# EAGLE board BRAT (EAGLE 7.7.0)
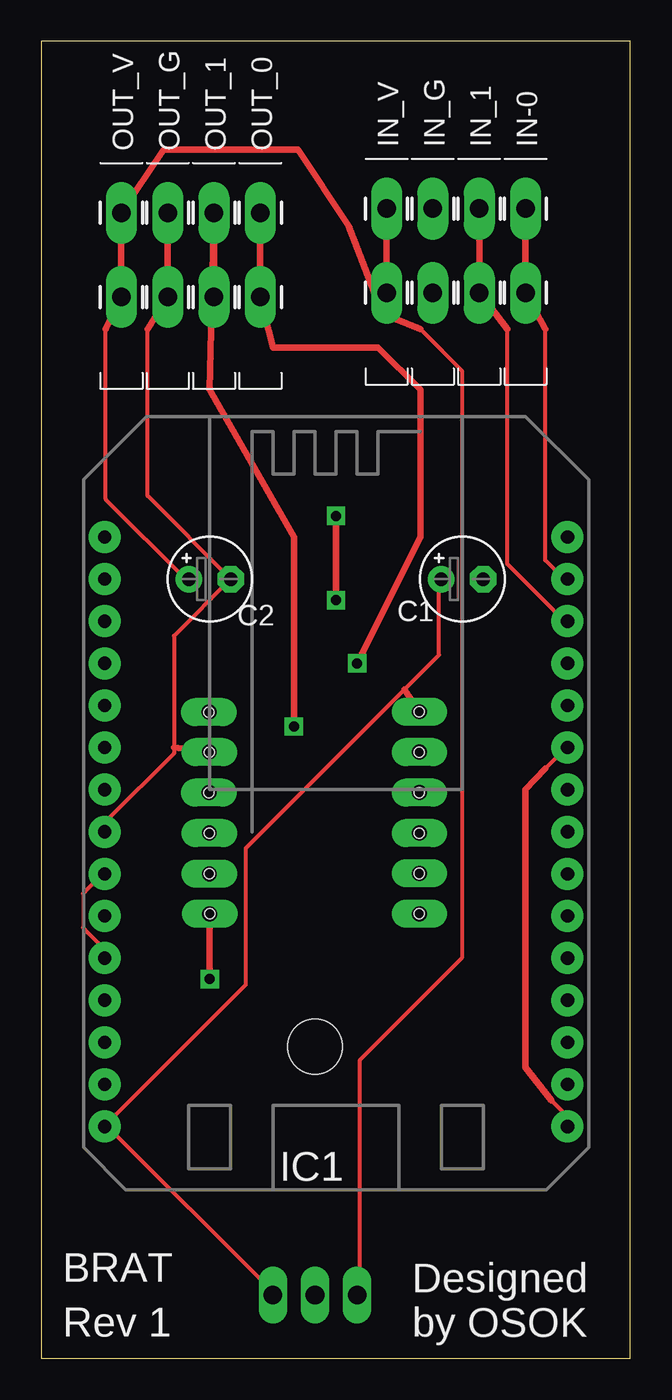
[diagram p0: board, top side]
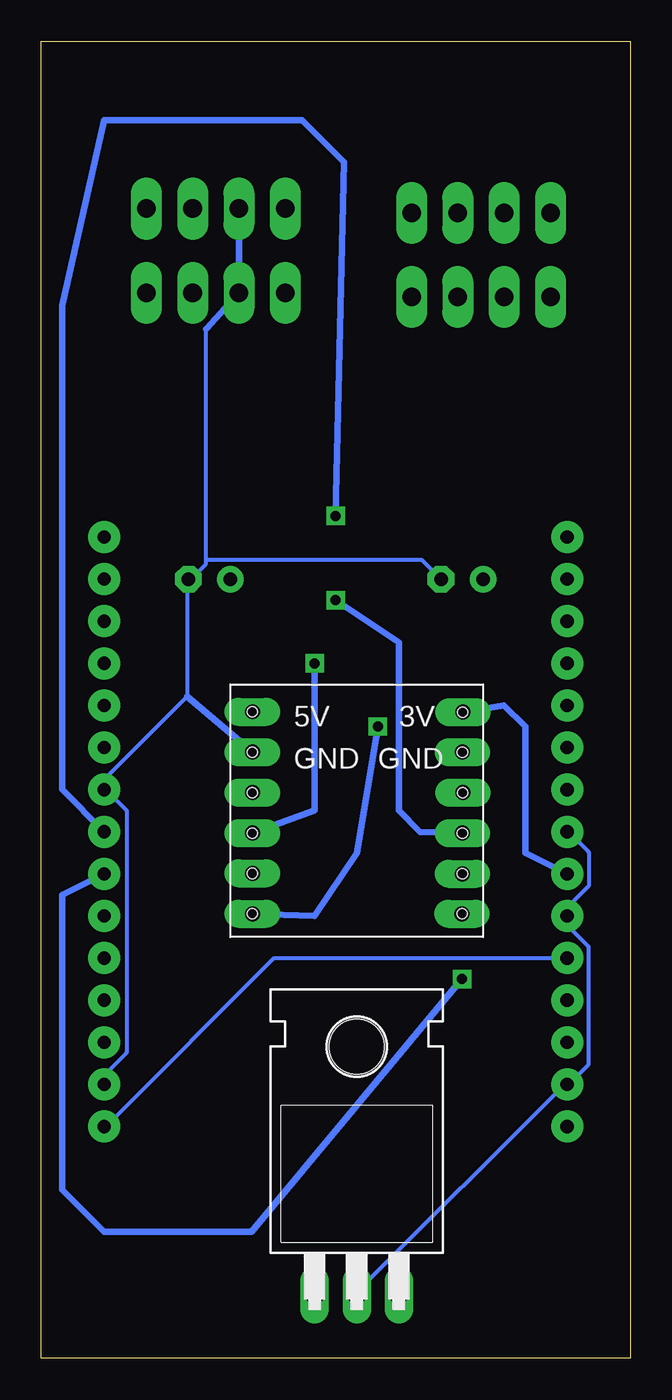
[diagram p1: board, bottom side, seen from below]

Size 35.54 x 79.43 mm. Coordinates in mm from the lower left corner, seen from the top.
Outline: 0,0 35.54,0 35.54,79.43 0,79.43 0,0
Copper layers (1*16): Top 0.035mm / dielectric 1.5mm / Bottom 0.035mm
Design rules "SparkFun": minimum track width 8mil, minimum drill 20mil, track to track 8mil, track to pad 8mil, pad to pad 8mil, via to via 8mil, smd to smd 8mil, copper to edge 10mil, drill to drill 8mil, minimum pad ring 12mil, minimum via ring 10mil, stop-mask expansion 4mil, vias tented up to drill 25mil, thermal gap 10mil

## Footprints (pad centres in the part's own frame; a part is rotated, then mirrored left to right if it is on the bottom)
E2,5-5 = drill 0.813 pad 1.6: + -1.27,0 | drill 0.813 pad 1.6 octagon: - 1.27,0
TO220H = drill 1.118 long: 1 -2.54,-10.16; 2 0,-10.16; 3 2.54,-10.16 | hole 3.302: 0,4.826
1X01_LONGPAD = drill 1.118 pad 1.88 long: 1 -5.08,0; 2 0,0
ESP12_DEVKIT = drill 0.8 pad 1.93: 3V3@0 -13.97,-7.62; 3V3@1 13.97,5.08; 3V3@2 13.97,-17.78; 3V3@3 -13.97,-2.54; 5V -13.97,-17.78; A0 -13.97,17.78; D0 13.97,17.78; D1 13.97,15.24; D2 13.97,12.7; D3 13.97,10.16; D4 13.97,7.62; D5 13.97,0; D6 13.97,-2.54; D7 13.97,-5.08; D8 13.97,-7.62; EN -13.97,-10.16; GND@0 -13.97,-5.08; GND@1 -13.97,-15.24; GND@2 13.97,2.54; GND@3 13.97,-15.24; GND@4 -13.97,0; RST -13.97,-12.7; RSV@0 -13.97,15.24; RSV@1 -13.97,12.7; RSV@2 -13.97,10.16; RSV@3 -13.97,7.62; RSV@4 -13.97,5.08; RSV@5 -13.97,2.54; RX 13.97,-10.16; TX 13.97,-12.7
TE291-THRU-HOLE = drill 0.9 pad 1.676 long: P$1 1.321,13.589; P$2 1.321,11.151; P$3 1.321,8.712; P$4 1.321,6.274; P$5 1.321,3.835; P$6 1.321,1.397; P$7 13.97,1.397; P$8 13.995,3.81; P$9 13.995,6.274; P$10 14.021,8.712; P$11 13.995,11.151; P$12 14.021,13.564 | hole 0.6: 1.321,1.397; 1.321,3.835; 1.321,6.274; 1.321,8.712; 1.321,11.151; 1.321,13.589; 13.97,1.397; 13.995,3.81; 13.995,6.274; 14.021,8.712; 13.995,11.151; 14.021,13.564

## Placement (x,y rotation side)
C1  10uF50V  [E2,5-5]  25.4,46.99 0 top
C2  10uF50V  [E2,5-5]  10.16,46.99 0 top
IC1  7805T  [TO220H]  16.51,13.97 0 bottom
IN-0  EDGE_WIRE_TERMINAL  [1X01_LONGPAD]  29.21,69.34 90 top
IN_1  EDGE_WIRE_TERMINAL  [1X01_LONGPAD]  26.42,69.34 90 top
IN_G  EDGE_WIRE_TERMINAL  [1X01_LONGPAD]  23.62,69.34 90 top
IN_V  EDGE_WIRE_TERMINAL  [1X01_LONGPAD]  20.83,69.34 90 top
OUT_0  EDGE_WIRE_TERMINAL  [1X01_LONGPAD]  13.21,69.09 90 top
OUT_1  EDGE_WIRE_TERMINAL  [1X01_LONGPAD]  10.41,69.09 90 top
OUT_G  EDGE_WIRE_TERMINAL  [1X01_LONGPAD]  7.62,69.09 90 top
OUT_V  EDGE_WIRE_TERMINAL  [1X01_LONGPAD]  4.83,69.09 90 top
U$1  ESP12_DEVKIT  [ESP12_DEVKIT]  17.78,31.75 0 top
U$2  TE291-DEV  [TE291-THRU-HOLE]  24.13,25.4 0 bottom

## Library data of the parts
C1 C2 = rcl
IC1 = linear
IN-0 IN_1 IN_G IN_V OUT_0 OUT_1 OUT_G OUT_V = GD_Edge_Wire_Terminal
U$1 = nodemcu-v0.9
U$2 = level-converter-TE291

## Nets
3V3: U$1.3V3@0 U$1.3V3@1 U$1.3V3@2 U$1.3V3@3 U$2.P$12
5V: C1.+ IC1.3 U$1.5V U$2.P$1
18V: C2.+ IC1.1 IN_V.1 IN_V.2 OUT_V.1 OUT_V.2
DATA0_3V3_OUT: U$1.D5 U$2.P$9
DATA0_IN: IN-0.1 IN-0.2 U$1.D1
DATA0_OUT: OUT_0.1 OUT_0.2 U$2.P$4
DATA1_3V3_OUT: U$1.D6 U$2.P$7
DATA1_IN: IN_1.1 IN_1.2 U$1.D2
DATA1_OUT: OUT_1.1 OUT_1.2 U$2.P$6
GND: C1.- C2.- IC1.2 IN_G.1 IN_G.2 OUT_G.1 OUT_G.2 U$1.GND@0 U$1.GND@1 U$1.GND@2 U$1.GND@3 U$1.GND@4 U$2.P$2 U$2.P$11

## Tracks (layer width: path | path; a pad name or v marks a point on that pad's centre or on a via)
3V3
  Top 0.254: U$1.3V3@0 3.66,24.13 3.66,24.82 2.52,25.96 2.52,28.02 3.66,29.16 U$1.3V3@3 | 30.4,15.9 30.77,15.53 31.55,14.76 31.55,14.07 U$1.3V3@2 | 30.4,35.56 31.55,36.7 U$1.3V3@1
  Top 0.406: 30.4,35.56 29.21,34.29 29.21,17.53 30.77,15.53
  Bottom 0.254: U$1.3V3@0 21.49,24.13 31.55,14.07 U$1.3V3@2
  Bottom 0.406: U$2.P$12 7.62,39.37 6.35,38.1 6.35,30.48 U$1.3V3@3
5V
  Top 0.254: 3.89,14.07 12.34,22.53 12.34,30.76 21.91,40.32 24,42.42 24,46.99 C1.+ | 3.89,14.07 13.95,4.01 IC1.3 | 3.89,14.07 U$1.5V
  Top 0.406: U$2.P$1 21.91,40.32
18V
  Top 0.254: 3.89,62.08 3.89,51.79 8.69,46.99 C2.+ | 22.86,62.08 25.38,59.56 25.38,24.13 19.2,17.96 19.2,4.01 IC1.1
  Top 0.406: 22.86,62.08 20.57,62.99 | 3.89,62.08 OUT_V.1 OUT_V.2 7.37,72.9 15.49,72.9 18.54,68.33 20.57,62.99 | 20.57,62.99 IN_V.1 IN_V.2
DATA0_3V3_OUT  (via drill 0.6)
  Top 0.406: v17.78,45.72 v17.78,50.8
  Bottom 0.406: U$2.P$9 12.7,31.75 13.97,33.02 13.97,43.18 v17.78,45.72 | v17.78,50.8 17.27,72.14 19.81,74.68 31.75,74.68 34.29,63.5 34.29,34.29 U$1.D5
DATA0_IN
  Top 0.254: 30.4,62.08 30.4,48.13 31.55,46.99 U$1.D1
  Top 0.406: 30.4,62.08 IN-0.1 IN-0.2
DATA0_OUT  (via drill 0.6)
  Top 0.406: v19.05,41.91 22.86,49.53 22.86,58.42 20.32,60.96 13.97,60.96 OUT_0.1 OUT_0.2
  Bottom 0.406: v19.05,41.91 19.05,33.02 U$2.P$4
DATA1_3V3_OUT  (via drill 0.6)
  Top 0.406: U$2.P$7 v10.16,22.86
  Bottom 0.406: v10.16,22.86 22.86,7.62 31.75,7.62 34.29,10.16 34.29,27.94 U$1.D6
DATA1_IN
  Top 0.254: 28.12,62.08 28.12,47.9 31.55,44.48 U$1.D2
  Top 0.406: 28.12,62.08 IN_1.1 IN_1.2
DATA1_OUT  (via drill 0.6)
  Top 0.406: v15.24,38.1 15.24,49.53 10.16,58.42 OUT_1.2 OUT_1.1
  Bottom 0.406: v15.24,38.1 16.51,30.48 19.05,26.67 U$2.P$6
GND
  Top 0.254: 6.4,62.08 6.4,52.02 C2.- 8,43.56 8,36.83 8,36.47 3.89,32.36 3.89,31.9 U$1.GND@4
  Top 0.406: U$2.P$11 8,36.83 | OUT_G.2 OUT_G.1 6.4,62.08
  Bottom 0.254: U$1.GND@4 3.66,31.67 2.52,30.53 2.52,28.47 3.66,27.33 3.66,26.87 U$1.GND@0 3.66,26.64 3.66,25.96 2.52,24.82 2.52,17.73 3.66,16.59 U$1.GND@1 3.89,16.59 16.46,4.01 IC1.2 | U$1.GND@3 31.55,16.59 31.55,17.27 30.4,18.41 30.4,33.05 31.55,34.19 U$1.GND@2 31.55,34.42 31.55,35.1 26.75,39.9 26.75,46.99 C1.- 26.52,46.99 25.6,47.9 25.6,48.13 | 25.6,48.13 25.6,62.08 | 25.6,48.13 12.57,48.13 C2.-
  Bottom 0.406: U$2.P$2 26.75,39.9 | 25.6,62.08 IN_G.1 IN_G.2

## Text on the board
tPlace: BRAT | Rev 1 | Designed / by OSOK